# Altium PCB PCB1.PcbDoc
Units mm, origin at the board's own origin, x right, y up, seen from the top; angles counter-clockwise.
Board outline 172 x 90 mm, 4 copper layers (Top Copper, GND, PWR, Bottom Copper), stack 1.57 mm thick; 81 components, 72 nets, 327 pads, 92 vias.
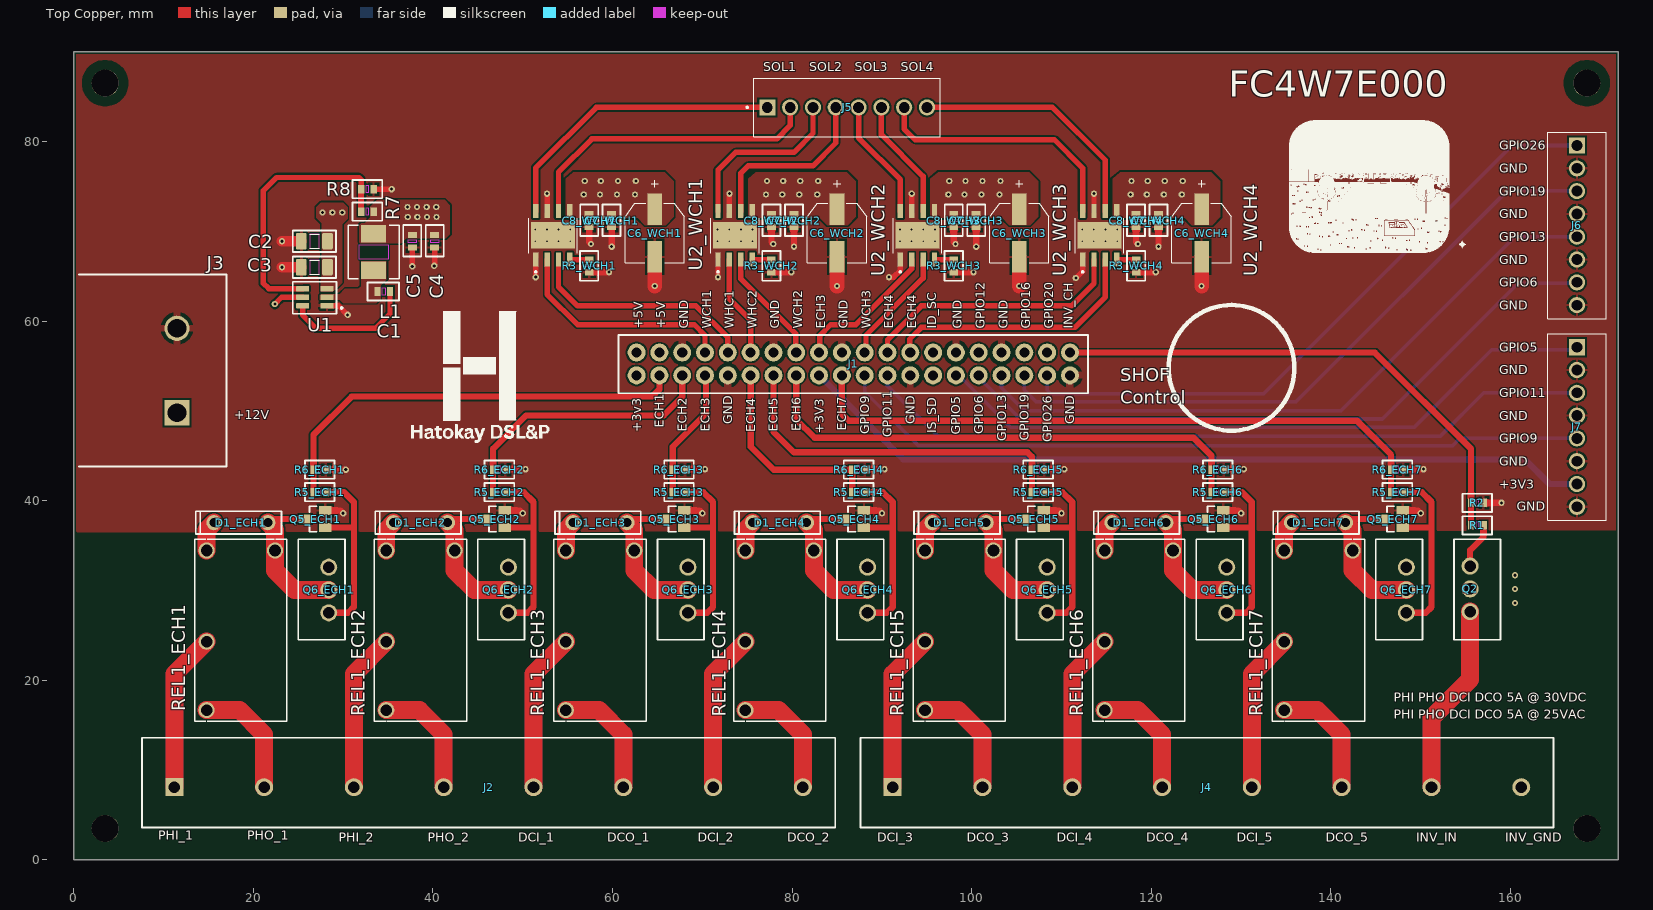
[diagram p0: Top Copper view]
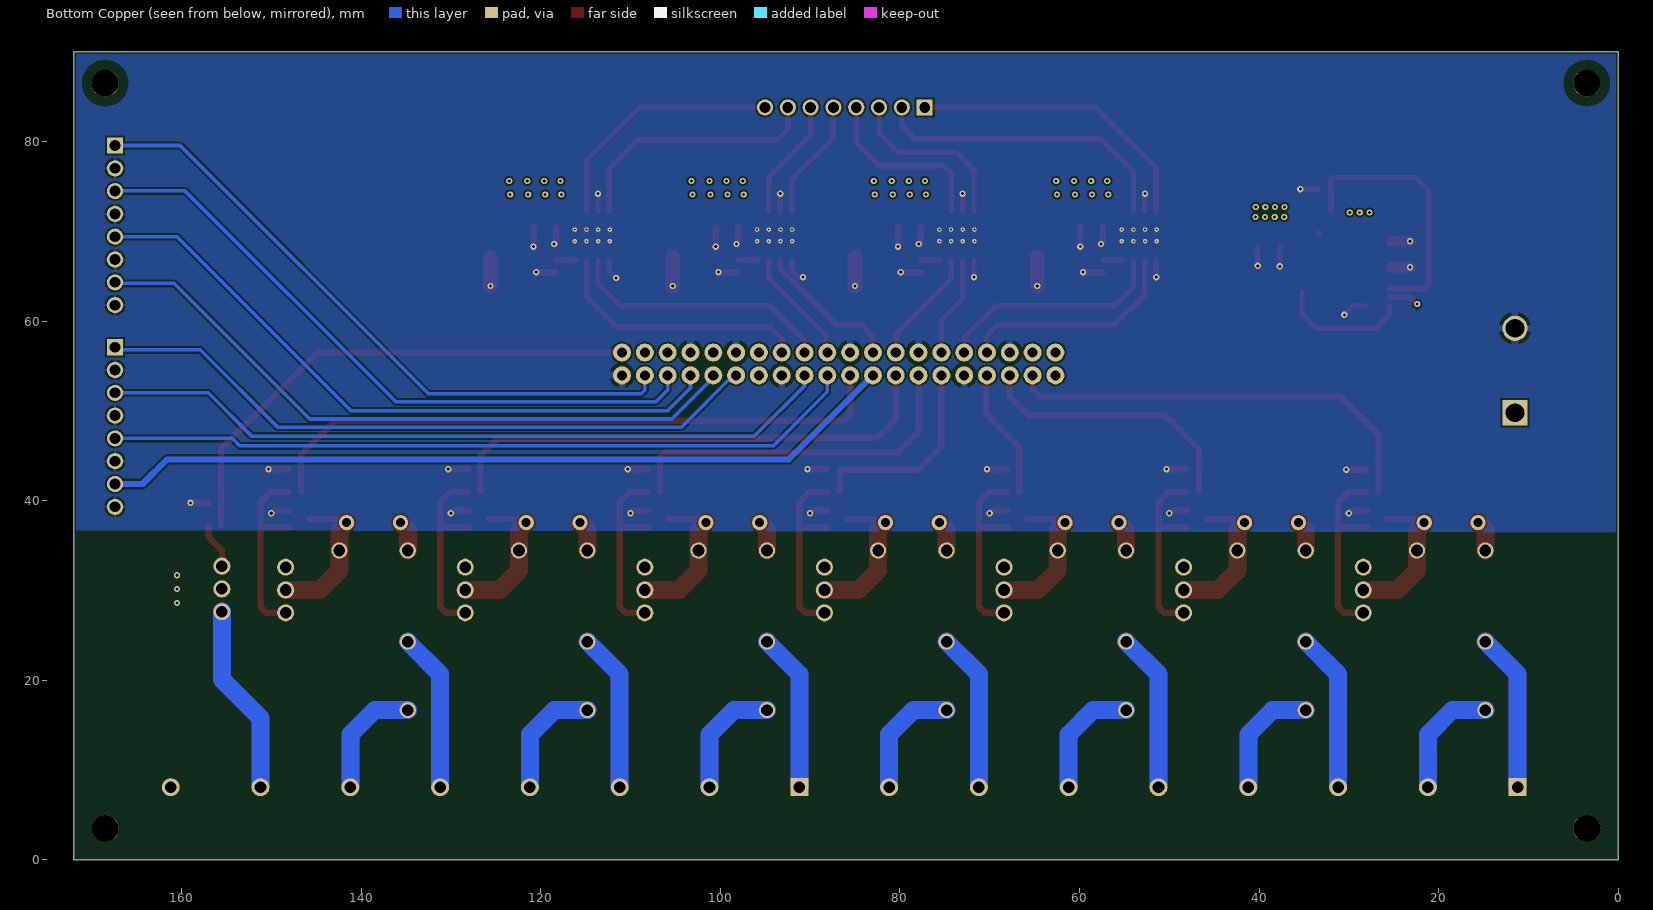
[diagram p1: Bottom Copper view, seen from below]
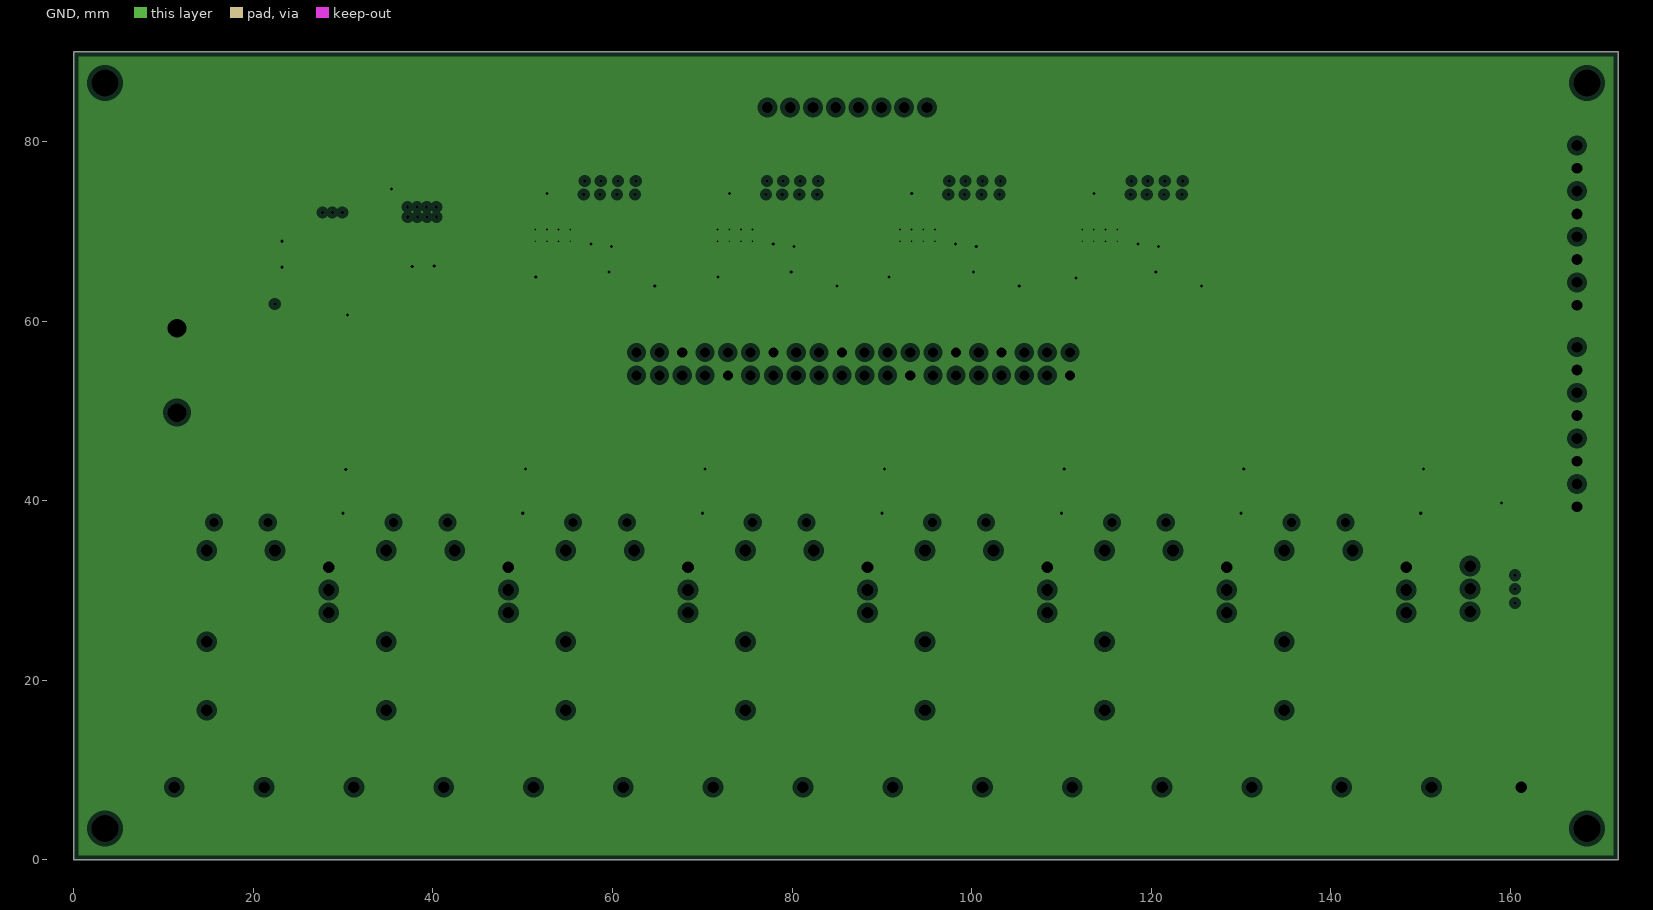
[diagram p2: GND, clearances drawn from the general rule]
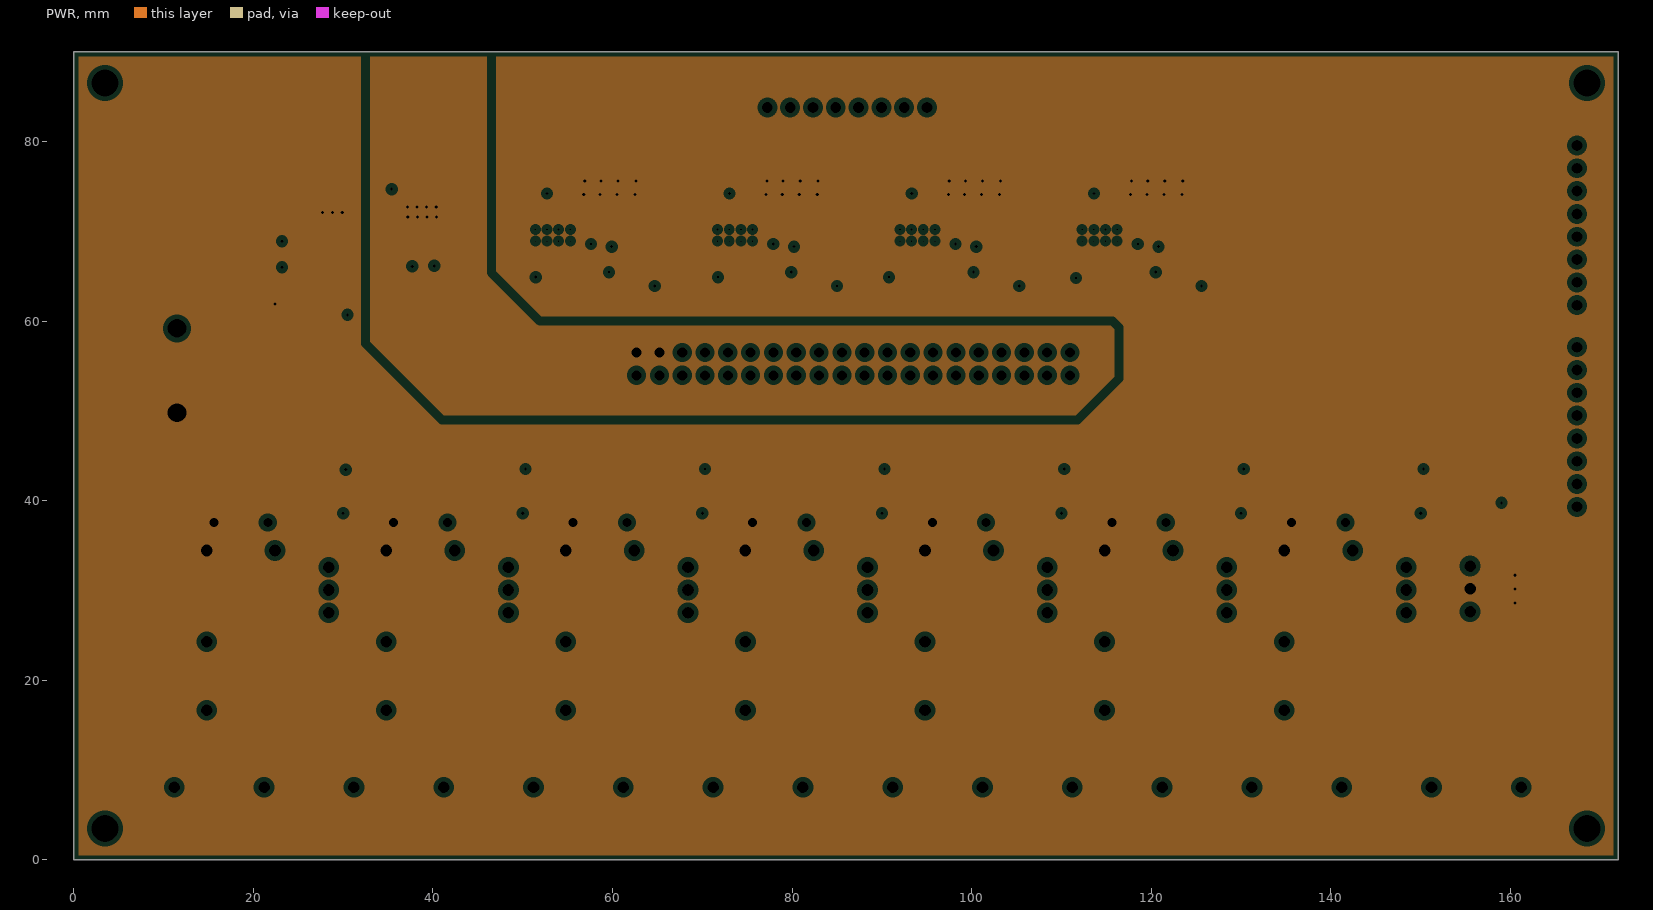
[diagram p3: PWR, clearances drawn from the general rule]
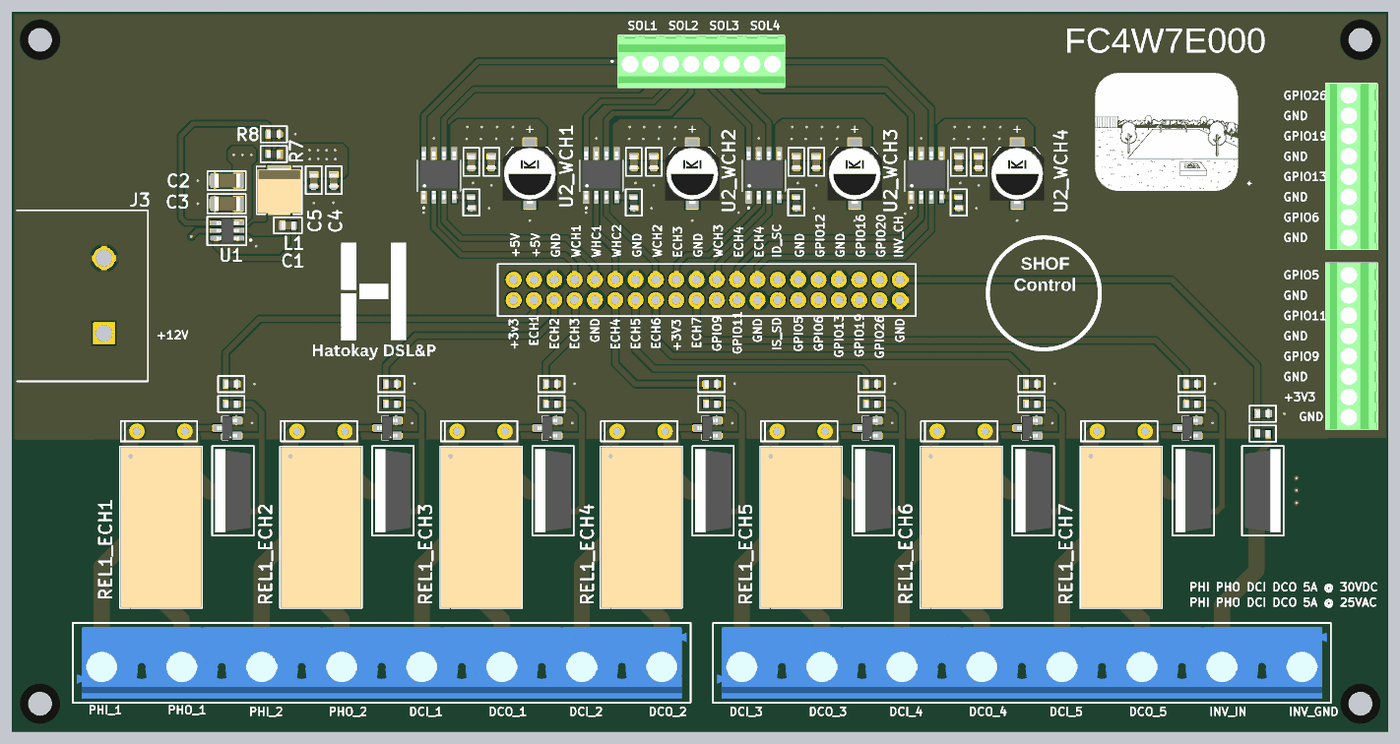
[diagram p4: 3D render of the assembled board from above, using the file's embedded part models]

## Layer stack, top to bottom
Top Mask: solder mask 0.015, Solder Resist, Dk 3.8
Top Copper: signal copper 0.035
Dielectric 1: prepreg 0.2, 7628, Dk 4.6
GND: plane copper 0.0175, net GND
Core: core 1.065, FR-4, Dk 4.5
PWR: plane copper 0.0175, net (Multiple Nets)
Dielectric 2: prepreg 0.2, 7628, Dk 4.6
Bottom Copper: signal copper 0.035
Bottom Mask: solder mask 0.015, Solder Resist, Dk 3.8

## Board outline
0,0 172,0 172,90 0,90

## Design rules (kind name [scope] priority, off if disabled: settings)
BoardOutlineClearance [All] p1: gap=0.3 ignorepadtopadclearanceinfootprint=FALSE except(0.4: Arc-SplitBarrior Arc-SplitContinuation Track-SplitBarrior Track-SplitContinuation SMDPad-SplitBarrior SMDPad-SplitContinuation THPad-SplitBarrior THPad-SplitContinuation Via-SplitBarrior Via-SplitContinuation Fill-SplitBarrior Fill-SplitContinuation Poly-SplitBarrior Poly-SplitContinuation Region-SplitBarrior Region-SplitContinuation Text-SplitBarrior Text-SplitContinuation)
Clearance "Clearance Different Nets" [All] p1: gap=0.2 ignorepadtopadclearanceinfootprint=FALSE except(0.089: Arc-Arc Arc-Track Arc-SMDPad Track-Track Track-SMDPad; 0.127: SMDPad-SMDPad SMDPad-Via THPad-Via Via-Via; 0.254: Arc-Via Arc-Text Track-Via Track-Text SMDPad-Text THPad-Text Via-Text Fill-Text Poly-Text Region-Text Text-Text; 0.5: THPad-THPad Via-Hole)
Clearance "Clearance Same Nets" [All] p2: gap=0.2 ignorepadtopadclearanceinfootprint=FALSE except(0.089: Arc-Arc Arc-Track Arc-SMDPad Track-Track Track-SMDPad SMDPad-SMDPad; 0.127: SMDPad-Via THPad-Via; 0.254: Arc-Via Arc-Text Track-Via Track-Text SMDPad-Text THPad-Text Via-Via Via-Text Fill-Text Poly-Text Region-Text Text-Text)
Clearance "Clearance Bottom Layer" [OnLayer('Bottom Layer')] p3: gap=0.203 ignorepadtopadclearanceinfootprint=TRUE except(0.254: Arc-Text Track-Text SMDPad-Text THPad-Text Via-Text Fill-Text Poly-Text Region-Text Text-Text)
Clearance "Clearance Top Layer" [OnLayer('Top Layer')] p4: gap=0.203 ignorepadtopadclearanceinfootprint=TRUE except(0.254: Arc-Text Track-Text SMDPad-Text THPad-Text Via-Text Fill-Text Poly-Text Region-Text Text-Text)
HoleSize [All] p1: absolutevalues=TRUE maxlimit=6.3 minlimit=0.2 maxpercent=80.000 minpercent=20.000
MinimumAnnularRing [All] p1: minimumring=0.13
MinimumSolderMaskSliver [All] p1: minsoldermaskwidth=0.1
PasteMaskExpansion [All] p1: expansion=0 percent=-20.000000
PlaneClearance [All] p1: clearance=0.508
PlaneConnect [All] p1: planeconnectstyle=Direct reliefexpansion=0.508 reliefentries=4 reliefconductorwidth=0.254 reliefairgap=0.254
PolygonConnect GND_J1_J3 [IsPad AND (InComponent('J1') OR InComponent('J3'))] p1: connectstyle=Relief reliefconductorwidth=0.8 reliefentries=4 polygonreliefangle="90 Angle" airgapwidth=0.4
PolygonConnect GND_U2 [IsPad AND (InComponent('U2_WCH1') OR InComponent('U2_WCH2') OR InComponent('U2_WCH3') OR InComponent('U2_WCH4'))] p2: connectstyle=Direct reliefconductorwidth=0.254 reliefentries=4 polygonreliefangle="90 Angle" airgapwidth=0.254
PolygonConnect GND [IsPad AND InNet('GND')] p3: connectstyle=Relief reliefconductorwidth=0.3 reliefentries=4 polygonreliefangle="90 Angle" airgapwidth=0.254
PolygonConnect PolygonConnect_1 [All] p4: connectstyle=Direct reliefconductorwidth=0.508 reliefentries=4 polygonreliefangle="90 Angle" airgapwidth=0.254
RoomDefinition WCH4 [InComponentClass('WCH4')] p1: confinementstyle=ConfineIn formatcopy=TRUE lockcomponents=FALSE outline 109.5,63.9 129.8,63.9 129.8,76.05 109.5,76.05
RoomDefinition WCH2 [InComponentClass('WCH2')] p2: confinementstyle=ConfineIn formatcopy=TRUE lockcomponents=FALSE outline 68.9,63.9 89.2,63.9 89.2,76.05 68.9,76.05
RoomDefinition WCH3 [InComponentClass('WCH3')] p3: confinementstyle=ConfineIn formatcopy=TRUE lockcomponents=FALSE outline 89.2,63.9 109.5,63.9 109.5,76.05 89.2,76.05
RoomDefinition WCH1 [InComponentClass('WCH1')] p4: confinementstyle=ConfineIn formatcopy=TRUE lockcomponents=FALSE outline 48.6,63.9 68.9,63.9 68.9,76.05 48.6,76.05
RoutingCorners [All] p1: cornerstyle=Round minsetback=2.54 maxsetback=2.54
RoutingVias [All] p1: holewidth=0.35 width=0.7 viastyle="Through Hole" minholewidth=0.35 minwidth=0.7 maxholewidth=0.35 maxwidth=0.7
SilkToSilkClearance [All] p1: silktosilkclearance=0.1
SilkToSolderMaskClearance [IsPad] p1: minsilkscreentomaskgap=0.1 clearancetoexposedcopper=TRUE
SolderMaskExpansion [All] p1: expansion=0.102 istentingtop=FALSE
Width [All] p1: maxlimit=2.54 minlimit=0.089 preferedwidth=0.381
22 further rules are at their usual default settings.

## Classes and differential pairs
component class ECH7: *_ECH7 D1_ECH7 Q5_ECH7 Q6_ECH7 R5_ECH7 R6_ECH7 REL1_ECH7
channel class "Water Channel": WCH1 WCH2 WCH3 WCH4
component class WCH4: *_WCH4 C6_WCH4 C7_WCH4 C8_WCH4 R3_WCH4 U2_WCH4
component class WCH3: *_WCH3 C6_WCH3 C7_WCH3 C8_WCH3 R3_WCH3 U2_WCH3
component class WCH2: *_WCH2 C6_WCH2 C7_WCH2 C8_WCH2 R3_WCH2 U2_WCH2
component class WCH1: *_WCH1 C6_WCH1 C7_WCH1 C8_WCH1 R3_WCH1 U2_WCH1
component class ECH6: *_ECH6 D1_ECH6 Q5_ECH6 Q6_ECH6 R5_ECH6 R6_ECH6 REL1_ECH6
component class ECH5: *_ECH5 D1_ECH5 Q5_ECH5 Q6_ECH5 R5_ECH5 R6_ECH5 REL1_ECH5
component class ECH4: *_ECH4 D1_ECH4 Q5_ECH4 Q6_ECH4 R5_ECH4 R6_ECH4 REL1_ECH4
component class ECH3: *_ECH3 D1_ECH3 Q5_ECH3 Q6_ECH3 R5_ECH3 R6_ECH3 REL1_ECH3
component class ECH2: *_ECH2 D1_ECH2 Q5_ECH2 Q6_ECH2 R5_ECH2 R6_ECH2 REL1_ECH2
component class ECH1: *_ECH1 D1_ECH1 Q5_ECH1 Q6_ECH1 R5_ECH1 R6_ECH1 REL1_ECH1
channel class "Electrical Channels": ECH1 ECH2 ECH3 ECH4 ECH5 ECH6 ECH7
component class "Power supply": * C1 C2 C3 C4 C5 L1 R7 R8 U1
component class Main: J1 J2 J3 J4 J5 J6 J7 Q2 R1 R2 U?

## Components (designator, comment, footprint, x,y, rotation, side; value= is the part's Value field where it differs from the comment)
C1 "0.1uF" C0603 34.871,63.8 r180 top
C2 "10uF" C1206 26.8,68.9 r0 top
C3 "10uF" C1206 26.8,66 r0 top
C4 "10uF" C0603 40.7,68.55 r90 top
C5 "10uF" C0603 38.2,68.55 r90 top
C6_WCH1 "47uF 25V" A768EB476M1ELAE042 64.7,69.8 r270 top (schematic designator C6)
C6_WCH2 "47uF 25V" A768EB476M1ELAE042 85,69.8 r270 top (schematic designator C6)
C6_WCH3 "47uF 25V" A768EB476M1ELAE042 105.3,69.8 r270 top (schematic designator C6)
C6_WCH4 "47uF 25V" A768EB476M1ELAE042 125.6,69.8 r270 top (schematic designator C6)
C7_WCH1 "0.1uF" C0603 60.4,70.844 r90 top (schematic designator C7)
C7_WCH2 "0.1uF" C0603 80.7,70.844 r90 top (schematic designator C7)
C7_WCH3 "0.1uF" C0603 101,70.844 r90 top (schematic designator C7)
C7_WCH4 "0.1uF" C0603 121.3,70.844 r90 top (schematic designator C7)
C8_WCH1 "0.1uF" C0603 57.9,70.844 r90 top (schematic designator C8)
C8_WCH2 "0.1uF" C0603 78.2,70.844 r90 top (schematic designator C8)
C8_WCH3 "0.1uF" C0603 98.5,70.844 r90 top (schematic designator C8)
C8_WCH4 "0.1uF" C0603 118.8,70.844 r90 top (schematic designator C8)
D1_ECH1 "1N5392" PCBComponent_1 15.61,37.56 r0 top (schematic designator D1)
D1_ECH2 "1N5392" PCBComponent_1 35.61,37.56 r0 top (schematic designator D1)
D1_ECH3 "1N5392" PCBComponent_1 55.61,37.56 r0 top (schematic designator D1)
D1_ECH4 "1N5392" PCBComponent_1 75.61,37.56 r0 top (schematic designator D1)
D1_ECH5 "1N5392" PCBComponent_1 95.61,37.56 r0 top (schematic designator D1)
D1_ECH6 "1N5392" PCBComponent_1 115.61,37.56 r0 top (schematic designator D1)
D1_ECH7 "1N5392" PCBComponent_1 135.61,37.56 r0 top (schematic designator D1)
J1 "2x20 header 2.54mm" "2x20 2.54mm header" 112.94,51.96 r180 top locked
J2 "691101810008" 691101810008 11.2,8.1 r0 top
J3 "XFHB9500G" XHFB9500G 11.5,49.8 r90 top
J4 "691101810008" 691101810008 91.2,8.1 r0 top
J5 "282834-8" 282834-8 77.24,83.8 r0 top
J6 "282834-8" 282834-8 167.4,79.56 r270 top
J7 "282834-8" 282834-8 167.4,57.1 r270 top
L1 "3.3uH 5A" IHLP2020CZER3R3M01 33.4,67.693 r270 top
Q2 "IRF530N0-Bojack" SOT78(TO220AB) 155.5,32.72 r270 top
Q5_ECH1 "FDN335N" "ON-SEMI SOT 23" 26.9,37.96 r90 top (schematic designator Q5)
Q5_ECH2 "FDN335N" "ON-SEMI SOT 23" 46.9,37.96 r90 top (schematic designator Q5)
Q5_ECH3 "FDN335N" "ON-SEMI SOT 23" 66.9,37.96 r90 top (schematic designator Q5)
Q5_ECH4 "FDN335N" "ON-SEMI SOT 23" 86.9,37.96 r90 top (schematic designator Q5)
Q5_ECH5 "FDN335N" "ON-SEMI SOT 23" 106.9,37.96 r90 top (schematic designator Q5)
Q5_ECH6 "FDN335N" "ON-SEMI SOT 23" 126.9,37.96 r90 top (schematic designator Q5)
Q5_ECH7 "FDN335N" "ON-SEMI SOT 23" 146.9,37.96 r90 top (schematic designator Q5)
Q6_ECH1 "IRF530N0-Bojack" SOT78(TO220AB) 28.4,27.52 r90 top (schematic designator Q6)
Q6_ECH2 "IRF530N0-Bojack" SOT78(TO220AB) 48.4,27.52 r90 top (schematic designator Q6)
Q6_ECH3 "IRF530N0-Bojack" SOT78(TO220AB) 68.4,27.52 r90 top (schematic designator Q6)
Q6_ECH4 "IRF530N0-Bojack" SOT78(TO220AB) 88.4,27.52 r90 top (schematic designator Q6)
Q6_ECH5 "IRF530N0-Bojack" SOT78(TO220AB) 108.4,27.52 r90 top (schematic designator Q6)
Q6_ECH6 "IRF530N0-Bojack" SOT78(TO220AB) 128.4,27.52 r90 top (schematic designator Q6)
Q6_ECH7 "IRF530N0-Bojack" SOT78(TO220AB) 148.4,27.52 r90 top (schematic designator Q6)
R1 "1K" R0603 156.3,37.26 r0 top
R2 "10K" R0603 156.3,39.76 r180 top
R3_WCH1 "20K" R0603 57.4,66.151 r90 top (schematic designator R3)
R3_WCH2 "20K" R0603 77.7,66.151 r90 top (schematic designator R3)
R3_WCH3 "20K" R0603 98,66.151 r90 top (schematic designator R3)
R3_WCH4 "20K" R0603 118.3,66.151 r90 top (schematic designator R3)
R5_ECH1 "1K" R0603 27.4,40.96 r0 top (schematic designator R5)
R5_ECH2 "1K" R0603 47.4,40.96 r0 top (schematic designator R5)
R5_ECH3 "1K" R0603 67.4,40.96 r0 top (schematic designator R5)
R5_ECH4 "1K" R0603 87.4,40.96 r0 top (schematic designator R5)
R5_ECH5 "1K" R0603 107.4,40.96 r0 top (schematic designator R5)
R5_ECH6 "1K" R0603 127.4,40.96 r0 top (schematic designator R5)
R5_ECH7 "1K" R0603 147.4,40.96 r0 top (schematic designator R5)
R6_ECH1 "10K" R0603 27.4,43.46 r180 top (schematic designator R6)
R6_ECH2 "10K" R0603 47.4,43.46 r180 top (schematic designator R6)
R6_ECH3 "10K" R0603 67.4,43.46 r180 top (schematic designator R6)
R6_ECH4 "10K" R0603 87.4,43.46 r180 top (schematic designator R6)
R6_ECH5 "10K" R0603 107.4,43.46 r180 top (schematic designator R6)
R6_ECH6 "10K" R0603 127.4,43.46 r180 top (schematic designator R6)
R6_ECH7 "10K" R0603 147.4,43.46 r180 top (schematic designator R6)
R7 "56K2" R0603 32.7,72.2 r0 top
R8 "10K" R0603 32.7,74.7 r180 top
REL1_ECH1 "ALQ3F12" ALQ3F12 14.8,34.46 r0 top (schematic designator REL1)
REL1_ECH2 "ALQ3F12" ALQ3F12 34.8,34.46 r0 top (schematic designator REL1)
REL1_ECH3 "ALQ3F12" ALQ3F12 54.8,34.46 r0 top (schematic designator REL1)
REL1_ECH4 "ALQ3F12" ALQ3F12 74.8,34.46 r0 top (schematic designator REL1)
REL1_ECH5 "ALQ3F12" ALQ3F12 94.8,34.46 r0 top (schematic designator REL1)
REL1_ECH6 "ALQ3F12" ALQ3F12 114.8,34.46 r0 top (schematic designator REL1)
REL1_ECH7 "ALQ3F12" ALQ3F12 134.8,34.46 r0 top (schematic designator REL1)
U1 "TPS563200DDCR" TI-SOT23 28.2,61.711 r180 top
U2_WCH1 "DRV8871DDAR" "TI-8-SO POWERPAD" 53.35,69.55 r90 top (schematic designator U2)
U2_WCH2 "DRV8871DDAR" "TI-8-SO POWERPAD" 73.65,69.55 r90 top (schematic designator U2)
U2_WCH3 "DRV8871DDAR" "TI-8-SO POWERPAD" 93.95,69.55 r90 top (schematic designator U2)
U2_WCH4 "DRV8871DDAR" "TI-8-SO POWERPAD" 114.25,69.55 r90 top (schematic designator U2)

## Footprints (in the part's own frame and the unit in brackets; to place one, negate y for a bottom-side part, rotate by r counter-clockwise, add the part's x,y. Pads: shape width x height; smd on the part's side, far side on the other; paste and mask are expansions set on the pad)
"2x20 2.54mm header" [mm]
  round 2 hole 1.125: 1(50.26,-2) 2(50.26,-4.54) 3(47.72,-2) 4(47.72,-4.54) 5(45.18,-2) 6(45.18,-4.54) 7(42.64,-2) 8(42.64,-4.54) 9(40.1,-2) 10(40.1,-4.54) 11(37.56,-2) 12(37.56,-4.54) 13(35.02,-2) 14(35.02,-4.54) 15(32.48,-2) 16(32.48,-4.54) 17(29.94,-2) 18(29.94,-4.54) 19(27.4,-2) 20(27.4,-4.54) 21(24.86,-2) 22(24.86,-4.54) 23(22.32,-2) 24(22.32,-4.54) 25(19.78,-2) 26(19.78,-4.54) 27(17.24,-2) 28(17.24,-4.54) 29(14.7,-2) 30(14.7,-4.54) 31(12.16,-2) 32(12.16,-4.54) 33(9.62,-2) 34(9.62,-4.54) 35(7.08,-2) 36(7.08,-4.54) 37(4.54,-2) 38(4.54,-4.54) 39(2,-2) 40(2,-4.54)
  silkscreen extent 0,-6.5 52.26,0
282834-8 [mm]
  rect 1.8x1.8 / inner round 1.8 / far side rect 1.8x1.8 hole 1.2: 1(0,0)
  round 1.8 hole 1.2 paste+0: 2(2.54,0) 3(5.08,0) 4(7.62,0) 5(10.16,0) 6(12.7,0) 7(15.24,0) 8(17.78,0)
  silkscreen extent -2.35,-3.25 19.28,3.25, body extent -1.5,-3.25 19.28,3.25, height 10
691101810008 [mm]
  rect 2x2 hole 1.3: 1(0,0)
  round 2 hole 1.3: 2(10,0) 3(20,0) 4(30,0) 5(40,0) 6(50,0) 7(60,0) 8(70,0)
  silkscreen extent -3.6,-4.5 73.6,5.5, body extent -3.1,-4 73.1,5, height 12.5
A768EB476M1ELAE042 [mm]
  rect 3.5x1.62 smd: 1(-2.65,0) 2(2.65,0)
  silkscreen extent -5.9,-3.3 3.3,3.3, body extent -3.7,-3.4 3.8,3.4, height 5.8
ALQ3F12 [mil]
  round 71 / inner round 60 / far side round 71 hole 51 paste-35.5 mask+0: 1(0,0) 2(300,0) 3(0,-400) 4(0,-700)
  silkscreen extent -52,-749 352,48, body extent -47,-744 347,44, height 630
C0603 [mm]
  rect 0.7x1 smd: 1(-0.35,0.5) 2(1.05,0.5)
  Top Copper keep-out region: 0.2,0.075 0.2,0.923 0.5,0.923 0.5,0.075
  silkscreen extent -1.35,-0.5 2.15,1.5, body extent -0.53,0.03 1.22,0.98, height 0.87
C1206 [mm]
  rrect25% 1.2x1.82 smd: 1(-1.46,0) 2(1.46,0)
  Top Copper keep-out region: -0.463,-0.825 -0.463,0.825 0.462,0.825 0.462,-0.825
  silkscreen extent -2.4,-1.2 2.4,1.2, body extent -1.5,-0.9 1.7,0.9, height 0.8
IHLP2020CZER3R3M01 [mil]
  rect 78x110 smd: 1(-80,0) 2(80,0)
  Top Copper keep-out region: -31.5,-62.99 -31.5,62.99 31.5,62.99 31.5,-62.99
  silkscreen extent -118,-112 118,112, body extent -108,-107 118,107, height 120
"ON-SEMI SOT 23" [mm]
  rect 1x1.4 smd: 1(-0.95,-1.1) 2(0.95,-1.1) 3(0,1.1)
  silkscreen extent -1.42,-0.15 1.42,0.66, body extent -1.46,-1.25 1.46,1.25, height 1.12
PCBComponent_1 [mm]
  round 1.7 hole 1: 1(0,0) 2(6,0)
  silkscreen extent -2.03,-1.27 7.53,1.27
R0603 [mil]
  rect 28x37 smd: 1(-27.5,0) 2(27.5,0)
  Top Copper keep-out region: -3.94,-16.5 -3.94,16.5 4.92,16.5 4.92,-16.5
  silkscreen extent -65,-40 65,40, body extent -34,-19 34,19, height 22
SOT78(TO220AB) [mm]
  round 1.9 hole 1.3: 1(0,0) 2(5.08,0) 3(2.54,0)
  silkscreen extent -3,-1.8 8.2,3.4, body extent -2.61,-1.42 7.81,3.02, height 20.3
"TI-8-SO POWERPAD" [mm]
  rrect5% 1.55x0.6 smd mask+0: 1(-2.7,1.905) 2(-2.7,0.635) 3(-2.7,-0.635) 4(-2.7,-1.905) 5(2.7,-1.905) 6(2.7,-0.635) 7(2.7,0.635) 8(2.7,1.905)
  round 0.5 hole 0.2: 9(-0.65,1.95) 9(-0.65,-0.65) 9(-0.65,0.65) 9(-0.65,-1.95) 9(0.65,1.95) 9(0.65,-0.65) 9(0.65,0.65) 9(0.65,-1.95)
  rect 2.95x4.9 smd paste-2539.97 mask+0.102: 9(0,0)
  silkscreen extent -4.17,-2.7 1.9,2.7, body extent -3,-2.45 3,2.45, height 1.7
TI-SOT23 [mm]
  rrect25% 1.45x0.6 smd: 1(0,0) 2(0,-0.95) 3(0,-1.9) 4(2.7,-1.9) 5(2.7,-0.95) 6(2.7,0)
  silkscreen extent -1.73,-2.67 3.81,0.89, body extent -0.14,-2.38 2.66,0.52, height 1.1
XHFB9500G [mm]
  rect 2.8x2.8 hole 2.1: 1(0,0)
  round 2.8 hole 2.1: 2(9.4,0)

## Part data
C1: library part KGM15BR71E104KT, "CAP CER 0.1UF 25V X7R 0603", Manufacturer="KYOCERA AVX", Manufacturer P/N=KGM15BR71E104KT
C2 C3: library part CL31A106KBHNNNE, "CAP CER 10UF 50V X5R 1206", Manufacturer="Samsung Electro-Mechanics", Manufacturer P/N=CL31A106KBHNNNE
C4 C5: library part CC0603MRX5R6BB106, "CAP CER 10UF 10V X5R 0603", Manufacturer=YAGEO, Manufacturer P/N=CC0603MRX5R6BB106
C6_WCH1 C6_WCH2 C6_WCH3 C6_WCH4: library part A768EB476M1ELAE042, "CAP ALUM POLY 47UF 20% 25V SMD", Manufacturer=KEMET, Manufacturer P/N=A768EB476M1ELAE042
C7_WCH1 C7_WCH2 C7_WCH3 C7_WCH4 C8_WCH1 C8_WCH2 C8_WCH3 C8_WCH4: library part C0603C104K5RECAUTO, "CAP CER 0.10UF 50V X7R 0603", Manufacturer=KEMET, Manufacturer P/N=C0603C104K5RECAUTO
D1_ECH1 D1_ECH2 D1_ECH3 D1_ECH4 D1_ECH5 D1_ECH6 D1_ECH7: "DIODE STANDARD 100V 1.5A DO204AL", Manufacturer="Vishay General Semiconductor - Diodes Division", Manufacturer P/N=1N5392-E3/54
J2 J4: "8 Position Wire to Board Terminal Block Horizontal with Board 0.394\" (10.00mm) Through Hole", Manufacturer="Würth Elektronik", Manufacturer P/N=691101810008
J3: Manufacturer=XF, Manufacturer P/N=XFHB9500G
J5 J6 J7: "TERM BLK 8P SIDE ENT 2.54MM PCB", Manufacturer="TE Connectivity AMP Connectors", Manufacturer P/N=282834-8
L1: library part IHLP2020CZER3R3M01, Manufacturer="Vishay Dale", Manufacturer P/N=IHLP2020CZER3R3M01
Q2: "MOSFET N-CH 100V 17A TO220AB", Manufacturer="Infineon Technologies", Manufacturer P/N=IRF530N0
Q5_ECH1 Q5_ECH2 Q5_ECH3 Q5_ECH4 Q5_ECH5 Q5_ECH6 Q5_ECH7: "MOSFET N-CH 20V 1.7A SUPERSOT3", Manufacturer=onsemi, Manufacturer P/N=FDN335N
Q6_ECH1 Q6_ECH2 Q6_ECH3 Q6_ECH4 Q6_ECH5 Q6_ECH6 Q6_ECH7: "MOSFET N-CH 100V 17A TO220AB", Manufacturer=Bojack, Manufacturer P/N=IRF530N0
R1 R5_ECH1 R5_ECH2 R5_ECH3 R5_ECH4 R5_ECH5 R5_ECH6 R5_ECH7: library part RMCF0603FT1K00, Manufacturer="Stackpole Electronics Inc", Manufacturer P/N=RMCF0603FT1K00
R2 R6_ECH1 R6_ECH2 R6_ECH3 R6_ECH4 R6_ECH5 R6_ECH6 R6_ECH7 R8: library part RMCF0603FT10K0, Manufacturer="Stackpole Electronics Inc", Manufacturer P/N=RMCF0603FT10K0
R3_WCH1 R3_WCH2 R3_WCH3 R3_WCH4: library part RC0603FR-0730KL, "RES 30K OHM 1% 1/10W 0603", Manufacturer=YAGEO, Manufacturer P/N=RC0603FR-0730KL
R7: library part RC0603FR-0756K2L, "RES 56.2K OHM 1% 1/10W 0603", Manufacturer=YAGEO, Manufacturer P/N=RC0603FR-0756K2L
REL1_ECH1 REL1_ECH2 REL1_ECH3 REL1_ECH4 REL1_ECH5 REL1_ECH6 REL1_ECH7: Manufacturer="Panasonic Electric Works", ComponentLink1Description="New link", Manufacturer P/N=ALQ3F12
U1: "IC REG BUCK ADJ 3A SOT23", Manufacturer="Texas Instruments", Manufacturer P/N=TPS563200DDCR
U2_WCH1 U2_WCH2 U2_WCH3 U2_WCH4: "Unipolar Motor Driver NMOS PWM 8-SO PowerPad", Manufacturer="Texas Instruments", Manufacturer P/N=DRV8871DDAR

## Free pads (board coordinates)
  round 3 hole 3 unplated mask+1: ""(3.5,3.5) ""(3.5,86.5) ""(168.5,3.5) ""(168.5,86.5)

## Via types
v1: diameter 0.7, hole 0.35, Top Copper to Bottom Copper, tented both sides, 92 vias

## Nets (pads, with @x,y where several pads share a name; then routed paths per layer and width w, separated by ;. In a path a pad name is that pad's centre, name@x,y a point inside that pad or via, vN(x,y) a via of type N, cw(c..) or ccw(c..) an arc to the next point about the centre after c; other vN are vias at no path point)
+3V3: J1.17 J7.7 | length 89.4
  Bottom Copper w0.7: J1.17 92.361,44.6 161.6,44.6 164.34,41.86 J7.7
+5V: C4.2 C5.2 J1.2 J1.4 L1.1 R7.2 | length 0
  Top Copper w0.7: L1.1@33.399,69.726 L1.1
  other v1: 37.2,71.6 38.267,71.6 39.333,71.6 40.4,71.6 37.167,72.7 38.233,72.7 39.3,72.7 40.367,72.7
+12V: C2.2 C3.2 C6_WCH1.1 C6_WCH2.1 C6_WCH3.1 C6_WCH4.1 C7_WCH1.2 C7_WCH2.2 C7_WCH3.2 C7_WCH4.2 C8_WCH1.2 C8_WCH2.2 C8_WCH3.2 C8_WCH4.2 D1_ECH1.1 D1_ECH2.1 D1_ECH3.1 D1_ECH4.1 D1_ECH5.1 D1_ECH6.1 D1_ECH7.1 J3.1 Q2.3 REL1_ECH1.1 REL1_ECH2.1 REL1_ECH3.1 REL1_ECH4.1 REL1_ECH5.1 REL1_ECH6.1 REL1_ECH7.1 U1.3 U1.5 U2_WCH1.5 U2_WCH2.5 U2_WCH3.5 U2_WCH4.5 | length 27.5
  Top Copper w0.6: v1(22.4,61.9) 23.161,62.661 U1.5
  Top Copper w2: REL1_ECH1.1 14.8,36.75 D1_ECH1.1 ; REL1_ECH2.1 34.8,36.75 D1_ECH2.1 ; REL1_ECH3.1 54.8,36.75 D1_ECH3.1 ; REL1_ECH4.1 74.8,36.75 D1_ECH4.1 ; REL1_ECH5.1 94.8,36.75 D1_ECH5.1 ; REL1_ECH6.1 114.8,36.75 D1_ECH6.1 ; REL1_ECH7.1 134.8,36.75 D1_ECH7.1
  other v1: 160.5,28.6 160.5,30.18 160.5,31.7 27.7,72.1 28.8,72.1 29.9,72.1 56.8,74.1 58.6,74.1 60.5,74.1 62.5,74.1 77.1,74.1 78.9,74.1 80.8,74.1 82.8,74.1 97.4,74.1 99.2,74.1 101.1,74.1 103.1,74.1 117.7,74.1 119.5,74.1 121.4,74.1 123.4,74.1 56.9,75.6 58.7,75.6 60.6,75.6 62.6,75.6 77.2,75.6 79,75.6 80.9,75.6 82.9,75.6 97.5,75.6 99.3,75.6 101.2,75.6 103.2,75.6 117.8,75.6 119.6,75.6 121.5,75.6 123.5,75.6
DCI_1: J2.5 REL1_ECH3.3 | length 35.4
  Top Copper w2: J2.5 51.2,20.7 REL1_ECH3.3
  Bottom Copper w2: J2.5 51.2,20.7 REL1_ECH3.3
DCI_2: J2.7 REL1_ECH4.3 | length 35.4
  Top Copper w2: J2.7 71.2,20.7 REL1_ECH4.3
  Bottom Copper w2: J2.7 71.2,20.7 REL1_ECH4.3
DCI_3: J4.1 REL1_ECH5.3 | length 35.4
  Top Copper w2: J4.1 91.2,20.7 REL1_ECH5.3
  Bottom Copper w2: J4.1 91.2,20.7 REL1_ECH5.3
DCI_4: J4.3 REL1_ECH6.3 | length 35.4
  Top Copper w2: J4.3 111.2,20.7 REL1_ECH6.3
  Bottom Copper w2: J4.3 111.2,20.7 REL1_ECH6.3
DCI_5: J4.5 REL1_ECH7.3 | length 35.4
  Top Copper w2: J4.5 131.2,20.7 REL1_ECH7.3
  Bottom Copper w2: J4.5 131.2,20.7 REL1_ECH7.3
DCO_1: J2.6 REL1_ECH3.4 | length 26.8
  Top Copper w2: REL1_ECH3.4 58.48,16.68 61.2,13.96 J2.6
  Bottom Copper w2: REL1_ECH3.4 58.48,16.68 61.2,13.96 J2.6
DCO_2: J2.8 REL1_ECH4.4 | length 26.8
  Top Copper w2: REL1_ECH4.4 78.48,16.68 81.2,13.96 J2.8
  Bottom Copper w2: REL1_ECH4.4 78.48,16.68 81.2,13.96 J2.8
DCO_3: J4.2 REL1_ECH5.4 | length 26.8
  Top Copper w2: REL1_ECH5.4 98.48,16.68 101.2,13.96 J4.2
  Bottom Copper w2: REL1_ECH5.4 98.48,16.68 101.2,13.96 J4.2
DCO_4: J4.4 REL1_ECH6.4 | length 26.8
  Top Copper w2: REL1_ECH6.4 118.48,16.68 121.2,13.96 J4.4
  Bottom Copper w2: REL1_ECH6.4 118.48,16.68 121.2,13.96 J4.4
DCO_5: J4.6 REL1_ECH7.4 | length 26.8
  Top Copper w2: REL1_ECH7.4 138.48,16.68 141.2,13.96 J4.6
  Bottom Copper w2: REL1_ECH7.4 138.48,16.68 141.2,13.96 J4.6
ECH1: J1.3 R5_ECH1.1 R6_ECH1.2 | length 48.6
  Top Copper w0.7: R5_ECH1.1 R6_ECH1.2 26.702,47.362 30.94,51.6 64.4,51.6 65.22,52.42 J1.3
ECH2: J1.5 R5_ECH2.1 R6_ECH2.2 | length 30.7
  Top Copper w0.7: R5_ECH2.1 R6_ECH2.2 46.702,45.802 50.4,49.5 65.7,49.5 67.76,51.56 J1.5
ECH3: J1.7 R5_ECH3.1 R6_ECH3.2 | length 14.6
  Top Copper w0.7: R5_ECH3.1 R6_ECH3.2 66.702,46.002 70.4,49.7 70.4,53.861 J1.7
ECH4: J1.11 R5_ECH4.1 R6_ECH4.2 | length 22.8
  Top Copper w0.7: J1.11 75.38,46.02 77.94,43.46 R6_ECH4.2 R5_ECH4.1
ECH5: J1.13 R5_ECH5.1 R6_ECH5.2 | length 40.2
  Top Copper w0.7: J1.13 77.92,47.68 80.2,45.4 106.2,45.4 106.702,44.898 R6_ECH5.2 R5_ECH5.1
ECH6: J1.15 R5_ECH6.1 R6_ECH6.2 | length 56.9
  Top Copper w0.7: J1.15 80.46,49.04 82.5,47 124.7,47 126.702,44.998 R6_ECH6.2 R5_ECH6.1
ECH7: J1.19 R5_ECH7.1 R6_ECH7.2 | length 71.8
  Top Copper w0.7: J1.19@85.75,53.75 J1.19 85.54,49.66 86.3,48.9 142.9,48.9 146.702,45.098 R6_ECH7.2 R5_ECH7.1
GND: C2.1 C3.1 C4.1 C5.1 C6_WCH1.2 C6_WCH2.2 C6_WCH3.2 C6_WCH4.2 C7_WCH1.1 C7_WCH2.1 C7_WCH3.1 C7_WCH4.1 C8_WCH1.1 C8_WCH2.1 C8_WCH3.1 C8_WCH4.1 J1.6 J1.9 J1.14 J1.20 J1.25 J1.30 J1.34 J1.39 J3.2 J4.8 J6.2 J6.4 J6.6 J6.8 J7.2 J7.4 J7.6 J7.8 Q5_ECH1.2 Q5_ECH2.2 Q5_ECH3.2 Q5_ECH4.2 Q5_ECH5.2 Q5_ECH6.2 Q5_ECH7.2 Q6_ECH1.2 Q6_ECH2.2 Q6_ECH3.2 Q6_ECH4.2 Q6_ECH5.2 Q6_ECH6.2 Q6_ECH7.2 R2.1 R3_WCH1.1 R3_WCH2.1 R3_WCH3.1 R3_WCH4.1 R6_ECH1.1 R6_ECH2.1 R6_ECH3.1 R6_ECH4.1 R6_ECH5.1 R6_ECH6.1 R6_ECH7.1 R8.1 U1.1 U2_WCH1.1 U2_WCH1.7 U2_WCH1.9 U2_WCH2.1 U2_WCH2.7 U2_WCH2.9 U2_WCH3.1 U2_WCH3.7 U2_WCH3.9 U2_WCH4.1 U2_WCH4.7 U2_WCH4.9 | length 100.8
  Top Copper w0.6: U1.1 29.489,61.711 v1(30.5,60.7) ; R8.1 v1(35.4,74.7) ; v1(37.7,66.1) C5.1 ; v1(40.15,66.155) 40.15,66.182 40.2,66.232 C4.1 ; v1(51.445,64.9) U2_WCH1.1 ; U2_WCH1.7 v1(52.715,74.2) ; v1(71.745,64.9) U2_WCH2.1 ; U2_WCH2.7 v1(73.015,74.2) ; v1(90.8,64.9) 91.3,64.9 92.045,65.645 U2_WCH3.1 ; U2_WCH3.7 v1(93.315,74.2) ; v1(111.6,64.8) 112.345,65.545 U2_WCH4.1 ; U2_WCH4.7 v1(113.615,74.2)
  Top Copper w0.7: Q5_ECH1.2 29.69,38.91 v1(30,38.6) ; R6_ECH1.1 v1(30.3,43.46) ; Q5_ECH2.2 49.69,38.91 v1(50,38.6) ; R6_ECH2.1@48.098,43.521 v1(50.299,43.521) ; R3_WCH1.1 v1(59.6,65.453) ; C8_WCH1.1 57.4,68.8 v1(57.6,68.6) ; v1(59.9,68.294) C7_WCH1.1 ; Q5_ECH3.2 69.69,38.91 v1(70,38.6) ; R6_ECH3.1@68.098,43.521 v1(70.299,43.521) ; R3_WCH2.1 v1(79.9,65.453) ; C8_WCH2.1 77.7,68.8 v1(77.9,68.6) ; v1(80.2,68.294) C7_WCH2.1 ; Q5_ECH4.2 89.69,38.91 v1(90,38.6) ; R6_ECH4.1@88.098,43.521 v1(90.299,43.521) ; R3_WCH3.1 v1(100.2,65.453) ; C8_WCH3.1 98,68.8 v1(98.2,68.6) ; v1(100.5,68.294) C7_WCH3.1 ; Q5_ECH5.2 109.69,38.91 v1(110,38.6) ; R6_ECH5.1@108.098,43.521 v1(110.299,43.521) ; R3_WCH4.1 v1(120.5,65.453) ; C8_WCH4.1 118.3,68.8 v1(118.5,68.6) ; v1(120.8,68.294) C7_WCH4.1 ; Q5_ECH6.2 129.69,38.91 v1(130,38.6) ; R6_ECH6.1@128.098,43.521 v1(130.299,43.521) ; Q5_ECH7.2 149.69,38.91 v1(150,38.6) ; R6_ECH7.1@148.098,43.521 v1(150.299,43.521) ; R2.1 v1(159,39.76)
  Top Copper w1.2: v1(23.2,66) C3.1 ; v1(23.2,68.9) C2.1
  Top Copper w1.62: v1(64.7,63.9) C6_WCH1.2 ; v1(85,63.9) C6_WCH2.2 ; v1(105.3,63.9) C6_WCH3.2 ; v1(125.6,63.9) C6_WCH4.2
GPIO5: J1.29 J7.1 | length 75.2
  Bottom Copper w0.4: J1.29 98.54,53.96 104.3,48.2 149.3,48.2 157.9,56.8 167.1,56.8 J7.1
GPIO6: J1.31 J6.7 | length 75.5
  Bottom Copper w0.4: J1.31 100.78,53.72 105.4,49.1 145.7,49.1 160.8,64.2 J6.7@167.828,64.2
GPIO9: J1.21 J7.5 | length 84
  Bottom Copper w0.4: J1.21 88.08,52.12 94.1,46.1 153.5,46.1 154.34,46.94 J7.5
GPIO11: J1.23 J7.3 | length 82.3
  Bottom Copper w0.4: J1.23 90.62,52.78 96.2,47.2 152.2,47.2 157.02,52.02 J7.3
GPIO13: J1.33 J6.5 | length 74.6
  Bottom Copper w0.4: J1.33 103.32,52.58 105.9,50 141.1,50 160.5,69.4 J6.5
GPIO19: J1.35 J6.3 | length 73.5
  Bottom Copper w0.4: J1.35 105.86,52.34 107.2,51 136.1,51 159.6,74.5 167.38,74.5 J6.3
GPIO26: J1.37 J6.1 | length 72.3
  Bottom Copper w0.4: J1.37 108.4,52.3 108.8,51.9 132.5,51.9 160.16,79.56 J6.1
INV_12V: J4.7 Q2.2 | length 42.6
  Top Copper w2: J4.7 151.2,15.8 155.5,20.1 Q2.2
  Bottom Copper w2: J4.7 151.2,15.8 155.5,20.1 Q2.2
Inveter_ch: J1.40 R1.1 R2.2 | length 57.6
  Top Copper w0.7: J1.40 144.9,56.5 155.602,45.798 R2.2 R1.1
NetC1_1: C1.1 U1.6 | length 14.5
  Top Copper w0.6: U1.6 25.5,60.7 27,59.2 33.6,59.2 35.221,60.821 C1.1
NetC1_2: C1.2 L1.2 U1.2
NetD1_ECH1_2: D1_ECH1.2 Q5_ECH1.3 Q6_ECH1.3 REL1_ECH1.2 | length 16.9
  Top Copper w0.7: D1_ECH1.2 21.881,37.56 22.281,37.96 Q5_ECH1.3
  Top Copper w2: D1_ECH1.2 22.42,36.75 REL1_ECH1.2 22.42,32.24 24.6,30.06 Q6_ECH1.3
NetD1_ECH2_2: D1_ECH2.2 Q5_ECH2.3 Q6_ECH2.3 REL1_ECH2.2 | length 16.9
  Top Copper w0.7: D1_ECH2.2 41.881,37.56 42.281,37.96 Q5_ECH2.3
  Top Copper w2: D1_ECH2.2 42.42,36.75 REL1_ECH2.2 42.42,32.24 44.6,30.06 Q6_ECH2.3
NetD1_ECH3_2: D1_ECH3.2 Q5_ECH3.3 Q6_ECH3.3 REL1_ECH3.2 | length 16.9
  Top Copper w0.7: D1_ECH3.2 61.881,37.56 62.281,37.96 Q5_ECH3.3
  Top Copper w2: D1_ECH3.2 62.42,36.75 REL1_ECH3.2 62.42,32.24 64.6,30.06 Q6_ECH3.3
NetD1_ECH4_2: D1_ECH4.2 Q5_ECH4.3 Q6_ECH4.3 REL1_ECH4.2 | length 16.9
  Top Copper w0.7: D1_ECH4.2 81.881,37.56 82.281,37.96 Q5_ECH4.3
  Top Copper w2: D1_ECH4.2 82.42,36.75 REL1_ECH4.2 82.42,32.24 84.6,30.06 Q6_ECH4.3
NetD1_ECH5_2: D1_ECH5.2 Q5_ECH5.3 Q6_ECH5.3 REL1_ECH5.2 | length 16.9
  Top Copper w0.7: D1_ECH5.2 101.881,37.56 102.281,37.96 Q5_ECH5.3
  Top Copper w2: D1_ECH5.2 102.42,36.75 REL1_ECH5.2 102.42,32.24 104.6,30.06 Q6_ECH5.3
NetD1_ECH6_2: D1_ECH6.2 Q5_ECH6.3 Q6_ECH6.3 REL1_ECH6.2 | length 16.9
  Top Copper w0.7: D1_ECH6.2 121.881,37.56 122.281,37.96 Q5_ECH6.3
  Top Copper w2: D1_ECH6.2 122.42,36.75 REL1_ECH6.2 122.42,32.24 124.6,30.06 Q6_ECH6.3
NetD1_ECH7_2: D1_ECH7.2 Q5_ECH7.3 Q6_ECH7.3 REL1_ECH7.2 | length 16.9
  Top Copper w0.7: D1_ECH7.2 141.881,37.56 142.281,37.96 Q5_ECH7.3
  Top Copper w2: D1_ECH7.2 142.42,36.75 REL1_ECH7.2 142.42,32.24 144.6,30.06 Q6_ECH7.3
NetQ2_1: Q2.1 R1.2 | length 5.2
  Top Copper w0.7: Q2.1 155.5,34.5 156.999,35.999 R1.2
NetQ5_ECH1_1: Q5_ECH1.1 Q6_ECH1.1 R5_ECH1.2 | length 21.5
  Top Copper w0.7: Q5_ECH1.1 31.19,37.01 31.2,37 ; R5_ECH1.2 30.1,40.96 31.2,39.861 31.2,37 ; Q6_ECH1.1 30.55,27.52 31.2,28.17 31.2,37
NetQ5_ECH2_1: Q5_ECH2.1 Q6_ECH2.1 R5_ECH2.2 | length 21.5
  Top Copper w0.7: Q5_ECH2.1 51.19,37.01 51.2,37 ; R5_ECH2.2 50.1,40.96 51.2,39.861 51.2,37 ; Q6_ECH2.1 50.55,27.52 51.2,28.17 51.2,37
NetQ5_ECH3_1: Q5_ECH3.1 Q6_ECH3.1 R5_ECH3.2 | length 21.5
  Top Copper w0.7: Q5_ECH3.1 71.19,37.01 71.2,37 ; R5_ECH3.2 70.1,40.96 71.2,39.861 71.2,37 ; Q6_ECH3.1 70.55,27.52 71.2,28.17 71.2,37
NetQ5_ECH4_1: Q5_ECH4.1 Q6_ECH4.1 R5_ECH4.2 | length 21.5
  Top Copper w0.7: Q5_ECH4.1 91.19,37.01 91.2,37 ; R5_ECH4.2 90.1,40.96 91.2,39.861 91.2,37 ; Q6_ECH4.1 90.55,27.52 91.2,28.17 91.2,37
NetQ5_ECH5_1: Q5_ECH5.1 Q6_ECH5.1 R5_ECH5.2 | length 21.5
  Top Copper w0.7: Q5_ECH5.1 111.19,37.01 111.2,37 ; R5_ECH5.2 110.1,40.96 111.2,39.861 111.2,37 ; Q6_ECH5.1 110.55,27.52 111.2,28.17 111.2,37
NetQ5_ECH6_1: Q5_ECH6.1 Q6_ECH6.1 R5_ECH6.2 | length 21.5
  Top Copper w0.7: Q5_ECH6.1 131.19,37.01 131.2,37 ; R5_ECH6.2 130.1,40.96 131.2,39.861 131.2,37 ; Q6_ECH6.1 130.55,27.52 131.2,28.17 131.2,37
NetQ5_ECH7_1: Q5_ECH7.1 Q6_ECH7.1 R5_ECH7.2 | length 21.5
  Top Copper w0.7: Q5_ECH7.1 151.19,37.01 151.2,37 ; R5_ECH7.2 150.1,40.96 151.2,39.861 151.2,37 ; Q6_ECH7.1 150.55,27.52 151.2,28.17 151.2,37
NetR3_WCH1_2: R3_WCH1.2 U2_WCH1.4 | length 2.3
  Top Copper w0.6: U2_WCH1.4@55.255,66.701 U2_WCH1.4 R3_WCH1.2
NetR3_WCH2_2: R3_WCH2.2 U2_WCH2.4 | length 2.3
  Top Copper w0.6: U2_WCH2.4@75.555,66.701 U2_WCH2.4 R3_WCH2.2
NetR3_WCH3_2: R3_WCH3.2 U2_WCH3.4 | length 2.3
  Top Copper w0.6: U2_WCH3.4@95.855,66.701 U2_WCH3.4 R3_WCH3.2
NetR3_WCH4_2: R3_WCH4.2 U2_WCH4.4 | length 2.3
  Top Copper w0.6: U2_WCH4.4@116.155,66.701 U2_WCH4.4 R3_WCH4.2
NetR7_1: R7.1 R8.2 U1.4 | length 30.1
  Top Copper w0.6: U1.4 21.72,63.611 21.1,64.231 21.1,74.5 22.6,76 31.77,76 32.002,75.769 R8.2
  Top Copper w0.7: R7.1 R8.2
PHI_1: J2.1 REL1_ECH1.3 | length 35.4
  Top Copper w2: J2.1 11.2,20.7 REL1_ECH1.3
  Bottom Copper w2: J2.1 11.2,20.7 REL1_ECH1.3
PHI_2: J2.3 REL1_ECH2.3 | length 35.4
  Top Copper w2: J2.3 31.2,20.7 REL1_ECH2.3
  Bottom Copper w2: J2.3 31.2,20.7 REL1_ECH2.3
PHO_1: J2.2 REL1_ECH1.4 | length 26.8
  Top Copper w2: REL1_ECH1.4 18.48,16.68 21.2,13.96 J2.2
  Bottom Copper w2: REL1_ECH1.4 18.48,16.68 21.2,13.96 J2.2
PHO_2: J2.4 REL1_ECH2.4 | length 26.8
  Top Copper w2: REL1_ECH2.4 38.48,16.68 41.2,13.96 J2.4
  Bottom Copper w2: REL1_ECH2.4 38.48,16.68 41.2,13.96 J2.4
SOL1_1: J5.2 U2_WCH1.6 | length 34.3
  Top Copper w0.6: U2_WCH1.6 53.985,76.585 57.7,80.3 78.3,80.3 79.78,81.78 J5.2
SOL1_2: J5.1 U2_WCH1.8 | length 33.4
  Top Copper w0.6: U2_WCH1.8 51.445,77.045 58.2,83.8 J5.1
SOL2_1: J5.4 U2_WCH2.6 | length 20.1
  Top Copper w0.6: U2_WCH2.6 74.285,76.485 75.1,77.3 82.3,77.3 84.86,79.86 J5.4
SOL2_2: J5.3 U2_WCH2.8 | length 19.7
  Top Copper w0.6: U2_WCH2.8 71.745,76.845 73.7,78.8 80.2,78.8 82.32,80.92 J5.3
SOL3_1: J5.6 U2_WCH3.6 | length 13.5
  Top Copper w0.6: J5.6 89.94,80.76 94.585,76.115 U2_WCH3.6
SOL3_2: J5.5 U2_WCH3.8 | length 13.5
  Top Copper w0.6: J5.5 87.4,80.4 92.045,75.755 U2_WCH3.8
SOL4_1: J5.8 U2_WCH4.6 | length 28
  Top Copper w0.6: J5.8 109,83.8 114.885,77.915 U2_WCH4.6
SOL4_2: J5.7 U2_WCH4.8 | length 28.9
  Top Copper w0.6: J5.7 92.48,81.42 93.7,80.2 109.2,80.2 112.345,77.055 U2_WCH4.8
WCH1_1: J1.10 U2_WCH1.3 | length 25.9
  Top Copper w0.6: U2_WCH1.3 53.985,63.815 56.1,61.7 69.3,61.7 72.84,58.16 J1.10
WCH1_2: J1.8 U2_WCH1.2 | length 25.2
  Top Copper w0.6: U2_WCH1.2 52.715,62.985 56.1,59.6 69.1,59.6 70.3,58.4 J1.8
WCH2_1: J1.16 U2_WCH2.3 | length 12.9
  Top Copper w0.6: U2_WCH2.3 74.285,64.715 80.4,58.6 80.4,56.561 J1.16
WCH2_2: J1.12 U2_WCH2.2 | length 11.3
  Top Copper w0.6: U2_WCH2.2 73.015,62.485 75.38,60.12 J1.12
WCH3_1: J1.22 U2_WCH3.3 | length 13
  Top Copper w0.6: J1.22 88.228,56.648 88.228,58.428 94.585,64.785 U2_WCH3.3
WCH3_2: J1.18 U2_WCH3.2 | length 16.3
  Top Copper w0.6: J1.18 83.087,56.587 83.087,58.387 84.3,59.6 87.1,59.6 93.315,65.815 U2_WCH3.2
WCH4_1: J1.26 U2_WCH4.3 | length 29.4
  Top Copper w0.6: J1.26@93.1,56.5 93.1,58 94.4,59.3 111.5,59.3 114.885,62.685 U2_WCH4.3
WCH4_2: J1.24 U2_WCH4.2 | length 29.7
  Top Copper w0.6: J1.24 90.62,57.92 94.4,61.7 111.1,61.7 113.615,64.215 U2_WCH4.2
pads on no net: J1.1 J1.27 J1.28 J1.32 J1.36 J1.38

## Polygon pours and split planes (outlines as drawn)
+12V on Top Copper "NONET_L-01_P-001" (solid, pour order 18): 75.1,75.858 75.1,71.5 83.1,71.5 83.9,70.7 86.2,70.7 87.1,71.6 87.1,75.6 86.1,76.6 75.95,76.6
+12V on Top Copper "NONET_L-01_P-001" (solid, pour order 20): 95.4,75.858 95.4,71.5 103.4,71.5 104.2,70.7 106.5,70.7 107.4,71.6 107.4,75.6 106.4,76.6 96.25,76.6
+12V on Top Copper "NONET_L-01_P-001" (solid, pour order 21): 115.7,75.858 115.7,71.5 123.7,71.5 124.5,70.7 126.8,70.7 127.7,71.6 127.7,75.6 126.7,76.6 116.55,76.6
GND on Top Copper "GND_L01_P022" (solid, remove dead copper, pour order 22): 0,0 172,0 172,90 0,90
NetC1_2 on Top Copper "Top Copper-NetC1_2" (solid, pour order 11): 29.6,63 30.2,63.6 31.7,63.6 32,63.9 32,66.7 34.8,66.7 34.8,64.6 34.175,63.975 34.175,62.475 33.7,62 30,62 29.647,62.353 27.447,62.353 27.4,62.4 27.4,62.9 27.5,63
+12V on Top Copper "NONET_L-01_P-001" (solid, pour order 0): 54.8,75.858 54.8,71.5 62.8,71.5 63.6,70.7 65.9,70.7 66.8,71.6 66.8,75.6 65.8,76.6 55.65,76.6
+5V on Top Copper "NONET_L-01_P-001" (solid, pour order 13): 41.455,69.255 41.9,69.7 41.9,72.9 41.3,73.5 33.8,73.5 33.041,72.741 33.041,71.541 32.4,70.9 32,70.9 31.8,70.7 31.8,68.8 31.9,68.7 36.5,68.7 37.055,69.255
+12V on Top Copper "NONET_L-01_P-001" (solid, pour order 8): 27.6,70.9 27,71.5 27,72.7 27.5,73.2 30,73.2 30.5,72.7 30.5,71.4 29.9,70.8 29.9,64.3 28.9,63.3 27.5,63.3 27.5,64.9 27.6,65
GND on Bottom Copper "GND_L04_P019" (solid, remove dead copper, pour order 19): 0,0 172,0 172,90 0,90
+5V on PWR (split plane): 45.998,65.4 46.007,65.302 46.036,65.208 46.082,65.121 46.145,65.045 51.545,59.645 51.621,59.582 51.708,59.536 51.802,59.507 51.9,59.498 115.492,59.498 115.898,59.092 115.898,53.808 111.592,49.502 41.208,49.502 33.002,57.708 33.002,89.49 45.998,89.49
+12V on PWR (split plane): 171.49,0.51 0.51,0.51 0.51,89.49 31.998,89.49 31.998,57.5 32.007,57.402 32.036,57.308 32.082,57.221 32.145,57.145 40.645,48.645 40.721,48.582 40.808,48.536 40.902,48.507 41,48.498 111.8,48.498 111.898,48.507 111.992,48.536 112.079,48.582 112.155,48.645 116.755,53.245 116.818,53.321 116.864,53.408 116.893,53.502 116.902,53.6 116.902,59.3 116.893,59.398 116.864,59.492 116.818,59.579 116.755,59.655 116.055,60.355 115.979,60.418 115.892,60.464 115.798,60.493 115.7,60.502 52.108,60.502 47.002,65.608 47.002,89.49 171.49,89.49
GND on GND (split plane): 171.49,0.51 0.51,0.51 0.51,89.49 171.49,89.49

## Other copper
Top Copper:
  pour cut-out: 168.5,0.921 cw(c168.5,3.5) 165.921,3.5 cw(c168.5,3.5) 168.5,6.079 cw(c168.5,3.5) 171.079,3.5 cw(c168.5,3.5)
  pour cut-out: 168.5,83.921 cw(c168.5,86.5) 165.921,86.5 cw(c168.5,86.5) 168.5,89.079 cw(c168.5,86.5) 171.079,86.5 cw(c168.5,86.5)
  pour cut-out: 3.5,83.921 cw(c3.5,86.5) 0.921,86.5 cw(c3.5,86.5) 3.5,89.079 cw(c3.5,86.5) 6.079,86.5 cw(c3.5,86.5)
  pour cut-out: 3.5,0.921 cw(c3.5,3.5) 0.921,3.5 cw(c3.5,3.5) 3.5,6.079 cw(c3.5,3.5) 6.079,3.5 cw(c3.5,3.5)
  pour cut-out: 0,36.499 172,36.704 172,0 0,0
Bottom Copper:
  pour cut-out: 168.5,0.921 cw(c168.5,3.5) 165.921,3.5 cw(c168.5,3.5) 168.5,6.079 cw(c168.5,3.5) 171.079,3.5 cw(c168.5,3.5)
  pour cut-out: 168.5,83.921 cw(c168.5,86.5) 165.921,86.5 cw(c168.5,86.5) 168.5,89.079 cw(c168.5,86.5) 171.079,86.5 cw(c168.5,86.5)
  pour cut-out: 3.5,83.921 cw(c3.5,86.5) 0.921,86.5 cw(c3.5,86.5) 3.5,89.079 cw(c3.5,86.5) 6.079,86.5 cw(c3.5,86.5)
  pour cut-out: 3.5,0.921 cw(c3.5,3.5) 0.921,3.5 cw(c3.5,3.5) 3.5,6.079 cw(c3.5,3.5) 6.079,3.5 cw(c3.5,3.5)
  pour cut-out: 0,36.499 172,36.704 172,0 0,0
PWR (plane layer: these items are gaps in the copper):
  lines w1: 32.5,89.8 32.5,57.5 41,49 111.8,49 116.4,53.6 116.4,59.3 115.7,60 51.9,60 46.5,65.4 46.5,89.9

## Silkscreen, mask and mechanical layers (free items; w line width, h text height)
Top Overlay:
  drawing of 123 lines, arcs and shapes, not listed
  text "SOL1" at 76.792,87.8 h1
  text "SOL2" at 81.892,87.8 h1
  text "SOL3" at 86.992,87.8 h1
  text "SOL4" at 92.092,87.8 h1
  text "FC4W7E000" at 128.6,84 h5
  text "GPIO26" at 158.754,79.06 h1
  text "GND" at 158.754,76.52 h1
  text "GPIO19" at 158.754,73.98 h1
  text "GND" at 158.754,71.44 h1
  text "GPIO13" at 158.754,68.9 h1
  text "GND" at 158.754,66.36 h1
  text "GPIO6" at 158.754,63.82 h1
  text "GND" at 158.754,61.28 h1
  text "+5V" at 63.347,59.153 h1 r90
  text "+5V" at 65.887,59.153 h1 r90
  text "GND" at 68.427,59.153 h1 r90
  text "WCH1" at 70.967,59.153 h1 r90
  text "WHC1" at 73.507,59.153 h1 r90
  text "WHC2" at 76.047,59.153 h1 r90
  text "GND" at 78.587,59.153 h1 r90
  text "WCH2" at 81.127,59.153 h1 r90
  text "ECH3" at 83.667,59.153 h1 r90
  text "GND" at 86.207,59.153 h1 r90
  text "WCH3" at 88.747,59.153 h1 r90
  text "ECH4" at 91.287,59.153 h1 r90
  text "ECH4" at 93.827,59.153 h1 r90
  text "ID_SC" at 96.034,59.153 h1 r90
  text "GND" at 98.907,59.153 h1 r90
  text "GPIO12" at 101.447,59.153 h1 r90
  text "GND" at 103.987,59.153 h1 r90
  text "GPIO16" at 106.527,59.153 h1 r90
  text "GPIO20" at 109.067,59.153 h1 r90
  text "INV_CH" at 111.274,59.153 h1 r90
  text "GPIO5" at 158.754,56.6 h1
  text "GND" at 158.754,54.06 h1
  text "GPIO11" at 158.754,51.52 h1
  text "SHOF  / Control" at 116.558,50.302 h2.5
  text "+12V" at 17.9,49.1 h1
  text "GND" at 158.754,48.98 h1
  text "GND" at 73.34,48.509 h1 r90
  text "GND" at 93.66,48.509 h1 r90
  text "GND" at 111.44,48.509 h1 r90
  text "ECH1" at 65.72,48.1 h1 r90
  text "ECH7" at 86.04,47.8 h1 r90
  text "ECH6" at 80.96,47.719 h1 r90
  text "ECH2" at 68.26,47.672 h1 r90
  text "ECH3" at 70.8,47.672 h1 r90
  text "ECH5" at 78.42,47.672 h1 r90
  text "ECH4" at 75.88,47.624 h1 r90
  text "+3v3" at 63.18,47.619 h1 r90
  text "IS_SD" at 96.034,47.514 h1 r90
  text "+3V3" at 83.5,47.462 h1 r90
  text "GPIO9" at 88.58,47.405 h1 r90
  text "GPIO6" at 101.28,47.405 h1 r90
  text "GPIO5" at 98.74,47.357 h1 r90
  text "GPIO11" at 91.12,47.053 h1 r90
  text "GPIO19" at 106.36,46.672 h1 r90
  text "GPIO13" at 103.82,46.624 h1 r90
  text "GPIO26" at 108.9,46.515 h1 r90
  text "GPIO9" at 158.754,46.44 h1
  text "GND" at 158.754,43.9 h1
  text "+3V3" at 158.754,41.36 h1
  text "GND" at 160.7,38.9 h1
  text "PHI PHO DCI DCO 5A @ 30VDC" at 147,17.6 h1
  text "PHI PHO DCI DCO 5A @ 25VAC" at 147,15.7 h1
  text "PHI_1" at 9.392,2.233 h1
  text "PHO_1" at 19.334,2.233 h1
  text "PHI_2" at 29.493,2.034 h1
  text "PHO_2" at 39.434,2.034 h1
  text "DCI_1" at 49.493,2.034 h1
  text "DCO_1" at 59.434,2.034 h1
  text "DCI_2" at 69.493,2.034 h1
  text "DCO_2" at 79.434,2.034 h1
  text "DCI_3" at 89.493,2.034 h1
  text "DCO_3" at 99.434,2.034 h1
  text "DCI_4" at 109.493,2.034 h1
  text "DCO_4" at 119.434,2.034 h1
  text "DCI_5" at 129.493,2.034 h1
  text "DCO_5" at 139.434,2.034 h1
  text "INV_IN" at 149.493,2.034 h1
  text "INV_GND" at 159.434,2.034 h1
Bottom Mask:
  lines w2: 11.2,8.1 11.2,20.7 14.8,24.3 ; 14.8,16.68 18.48,16.68 21.2,13.96 21.2,8.1 ; 31.2,8.1 31.2,20.7 34.8,24.3 ; 34.8,16.68 38.48,16.68 41.2,13.96 41.2,8.1 ; 51.2,8.1 51.2,20.7 54.8,24.3 ; 54.8,16.68 58.48,16.68 61.2,13.96 61.2,8.1 ; 71.2,8.1 71.2,20.7 74.8,24.3 ; 74.8,16.68 78.48,16.68 81.2,13.96 81.2,8.1 ; 91.2,8.1 91.2,20.7 94.8,24.3 ; 94.8,16.68 98.48,16.68 101.2,13.96 101.2,8.1 ; 111.2,8.1 111.2,20.7 114.8,24.3 ; 114.8,16.68 118.48,16.68 121.2,13.96 121.2,8.1 ; 131.2,8.1 131.2,20.7 134.8,24.3 ; 134.8,16.68 138.48,16.68 141.2,13.96 141.2,8.1 ; 151.2,8.1 151.2,15.8 155.5,20.1 155.5,27.64